# Altium PCB Backlight_V2.PcbDoc
Units mm, origin at the board's own origin, x right, y up, seen from the top; angles counter-clockwise.
Board outline 300.25 x 200.25 mm, 2 copper layers (Top Layer, Bottom Layer); 98 components, 59 nets, 200 pads, 33 vias.
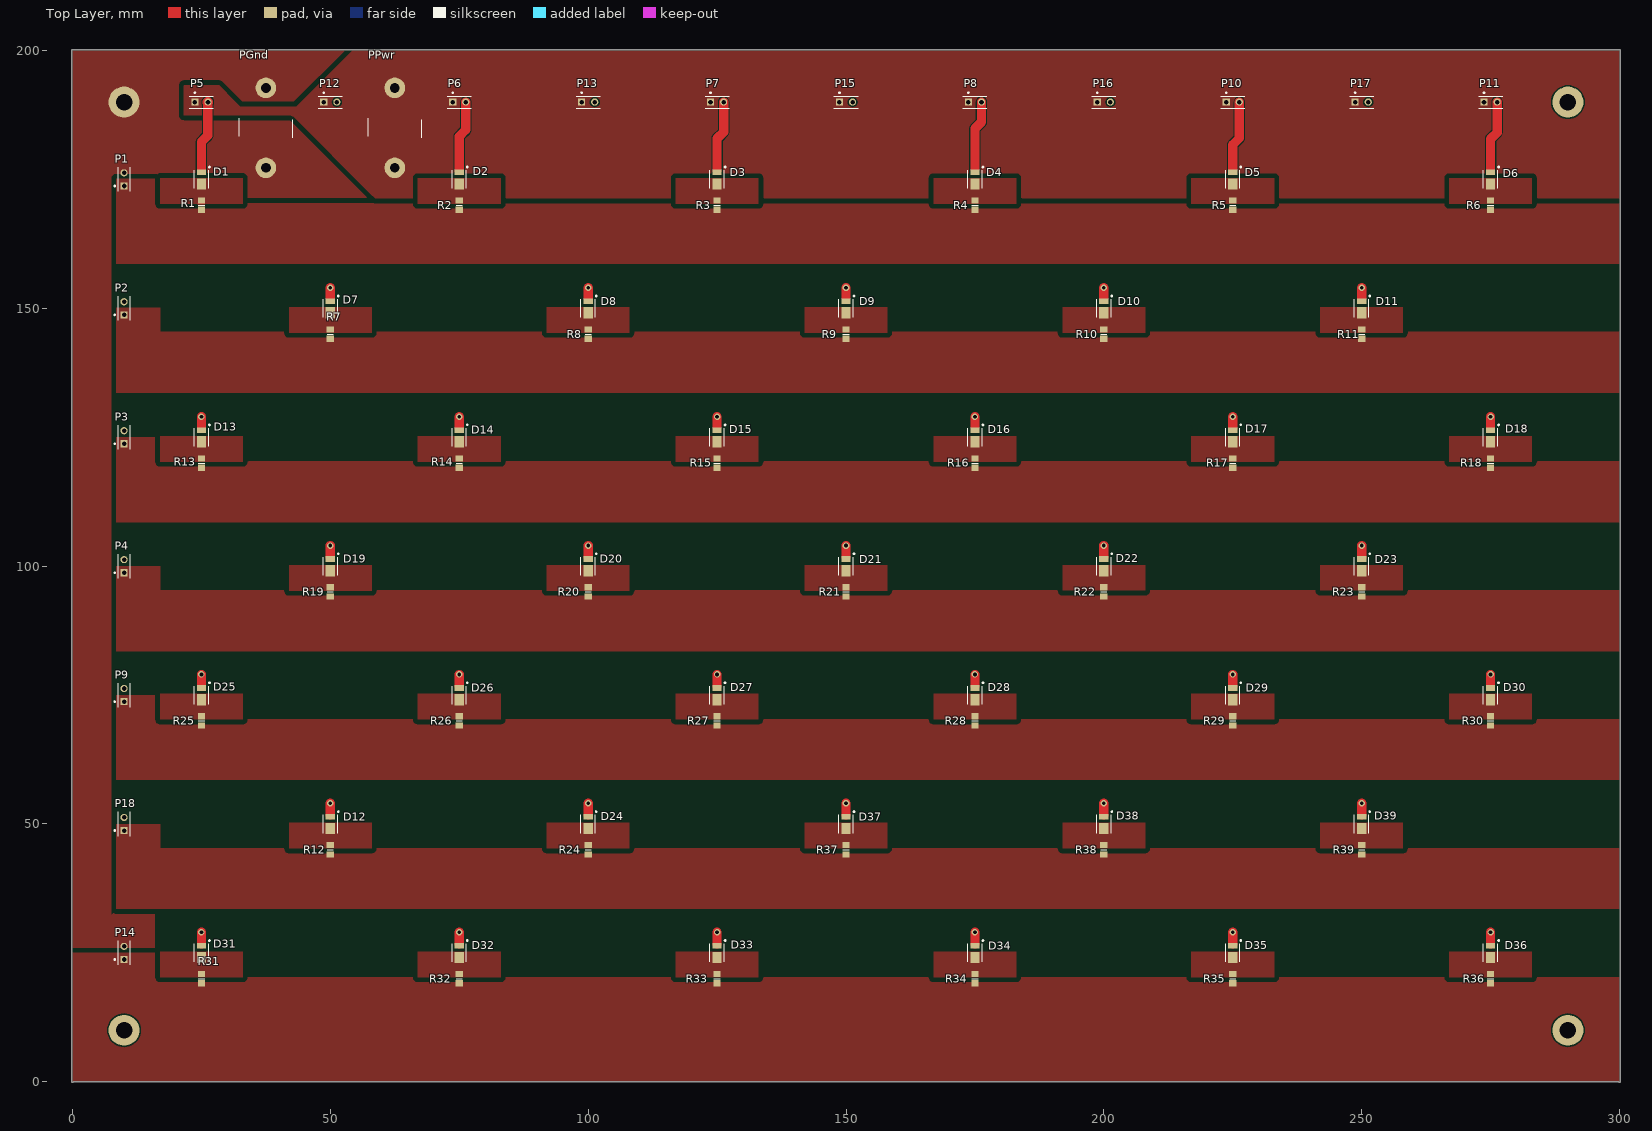
[diagram p0: Top Layer view]
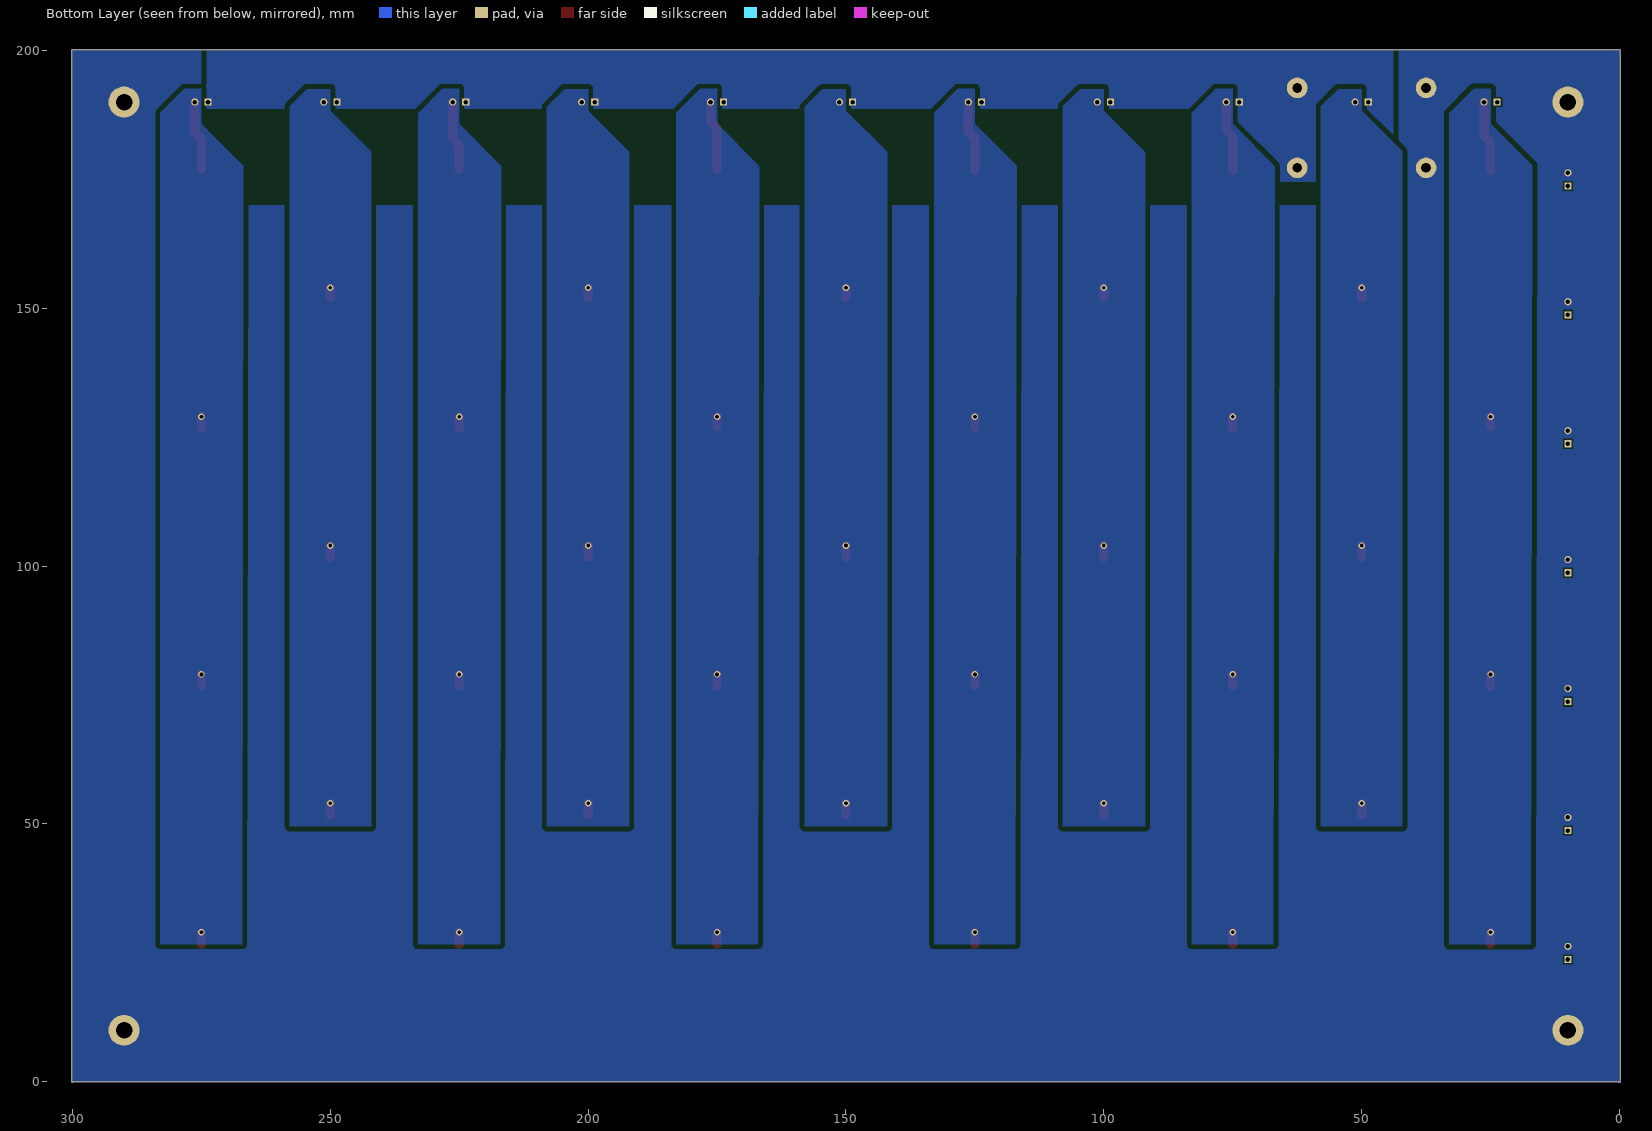
[diagram p1: Bottom Layer view, seen from below]
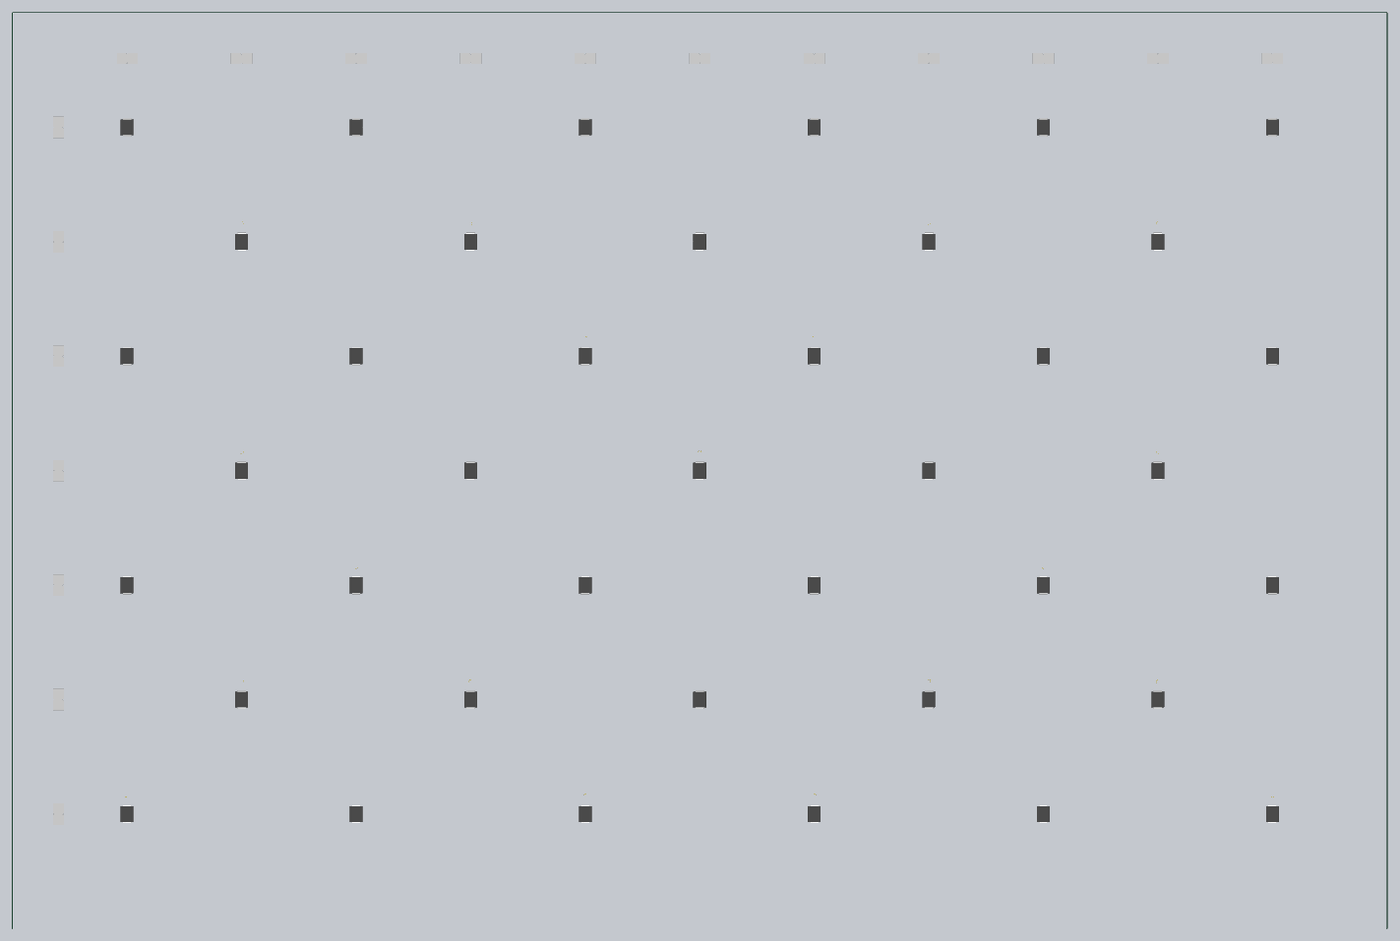
[diagram p2: 3D render of the assembled board from above, using the file's embedded part models]

## Layer stack, top to bottom
Top Solder: solder mask 0.0102, Solder Resist, Dk 3.5
Top Layer: signal copper 0.0356
Dielectric 1: dielectric 0.32, FR-4, Dk 4.8
Bottom Layer: signal copper 0.0356
Bottom Solder: solder mask 0.0102, Solder Resist, Dk 3.5

## Board outline
-0.127,0 -0.127,200 cw(c0,200) 0,200.127 300,200.127 cw(c300,200) 300.127,200 300.127,0 cw(c300,0) 299.873,0 0.127,0 cw(c0,0)

## Design rules (kind name [scope] priority, off if disabled: settings)
Clearance [All] p1: gap=0.254 ignorepadtopadclearanceinfootprint=FALSE except(0: Arc-Hole Track-Hole SMDPad-Hole THPad-Hole Via-Hole Fill-Hole Poly-Hole Region-Hole Text-Hole; 1: Fill-Fill Fill-Poly Fill-Region Poly-Poly Poly-Region Region-Region)
PolygonConnect [All] p1: connectstyle=Direct reliefconductorwidth=0.254 reliefentries=4 polygonreliefangle="90 Angle" airgapwidth=0.254
RoomDefinition Backlight_V2 [InComponentClass('Backlight_V2')] p1: confinementstyle=ConfineIn formatcopy=TRUE lockcomponents=FALSE outline 0,0 300.101,0 300.101,200.025 0,200.025
RoutingVias [All] p1: holewidth=0.711 width=1.27 viastyle="Through Hole" minholewidth=0.711 minwidth=1.27 maxholewidth=0.711 maxwidth=1.27
SolderMaskExpansion [All] p1: expansion=0.102 istentingtop=FALSE
Width [All] p1: maxlimit=10 minlimit=0.1 preferedwidth=1.8
30 further rules are at their usual default settings.

## Components (designator, comment, footprint, x,y, rotation, side; value= is the part's Value field where it differs from the comment)
D1 "LED0" DIOM3528X07N 25,175 r270 top
D2 "LED0" DIOM3528X07N 75,175 r270 top
D3 "LED0" DIOM3528X07N 125,175 r270 top
D4 "LED0" DIOM3528X07N 175,175 r270 top
D5 "LED0" DIOM3528X07N 225,175 r270 top
D6 "LED0" DIOM3528X07N 275,175 r270 top
D7 "LED0" DIOM3528X07N 50,150 r270 top
D8 "LED0" DIOM3528X07N 100,150 r270 top
D9 "LED0" DIOM3528X07N 150,150 r270 top
D10 "LED0" DIOM3528X07N 200,150 r270 top
D11 "LED0" DIOM3528X07N 250,150 r270 top
D12 "LED0" DIOM3528X07N 50,50 r270 top
D13 "LED0" DIOM3528X07N 25,125 r270 top
D14 "LED0" DIOM3528X07N 75,125 r270 top
D15 "LED0" DIOM3528X07N 125,125 r270 top
D16 "LED0" DIOM3528X07N 175,125 r270 top
D17 "LED0" DIOM3528X07N 225,125 r270 top
D18 "LED0" DIOM3528X07N 275,125 r270 top
D19 "LED0" DIOM3528X07N 50,100 r270 top
D20 "LED0" DIOM3528X07N 100,100 r270 top
D21 "LED0" DIOM3528X07N 150,100 r270 top
D22 "LED0" DIOM3528X07N 200,100 r270 top
D23 "LED0" DIOM3528X07N 250,100 r270 top
D24 "LED0" DIOM3528X07N 100,50 r270 top
D25 "LED0" DIOM3528X07N 25,75 r270 top
D26 "LED0" DIOM3528X07N 75,75 r270 top
D27 "LED0" DIOM3528X07N 125,75 r270 top
D28 "LED0" DIOM3528X07N 175,75 r270 top
D29 "LED0" DIOM3528X07N 225,75 r270 top
D30 "LED0" DIOM3528X07N 275,75 r270 top
D31 "LED0" DIOM3528X07N 25,25 r270 top
D32 "LED0" DIOM3528X07N 75,25 r270 top
D33 "LED0" DIOM3528X07N 125,25 r270 top
D34 "LED0" DIOM3528X07N 175,25 r270 top
D35 "LED0" DIOM3528X07N 225,25 r270 top
D36 "LED0" DIOM3528X07N 275,25 r270 top
D37 "LED0" DIOM3528X07N 150,50 r270 top
D38 "LED0" DIOM3528X07N 200,50 r270 top
D39 "LED0" DIOM3528X07N 250,50 r270 top
P1 "5-146280-2" TECO-5-146280-2_V 10,175 r90 top
P2 "5-146280-2" TECO-5-146280-2_V 10,150 r90 top
P3 "5-146280-2" TECO-5-146280-2_V 10,125 r90 top
P4 "5-146280-2" TECO-5-146280-2_V 10,100 r90 top
P5 "5-146280-2" TECO-5-146280-2_V 25,190 r0 top
P6 "5-146280-2" TECO-5-146280-2_V 75,190 r0 top
P7 "5-146280-2" TECO-5-146280-2_V 125,190 r0 top
P8 "5-146280-2" TECO-5-146280-2_V 175,190 r0 top
P9 "5-146280-2" TECO-5-146280-2_V 10,75 r90 top
P10 "5-146280-2" TECO-5-146280-2_V 225,190 r0 top
P11 "5-146280-2" TECO-5-146280-2_V 275,190 r0 top
P12 "5-146280-2" TECO-5-146280-2_V 50,190 r0 top
P13 "5-146280-2" TECO-5-146280-2_V 100,190 r0 top
P14 "5-146280-2" TECO-5-146280-2_V 10,25 r90 top
P15 "5-146280-2" TECO-5-146280-2_V 150,190 r0 top
P16 "5-146280-2" TECO-5-146280-2_V 200,190 r0 top
P17 "5-146280-2" TECO-5-146280-2_V 250,190 r0 top
P18 "5-146280-2" TECO-5-146280-2_V 10,50 r90 top
PGnd "Plug" Bananenbuchse 37.5,185 r90 top
PPwr "Plug" Bananenbuchse 62.5,185 r90 top
R1 "Res2" 6-0805_N 25,170 r90 top value=100
R2 "Res2" 6-0805_N 75,170 r90 top value=100
R3 "Res2" 6-0805_N 125,170 r90 top value=100
R4 "Res2" 6-0805_N 175,170 r90 top value=100
R5 "Res2" 6-0805_N 225,170 r90 top value=100
R6 "Res2" 6-0805_N 275,170 r90 top value=100
R7 "Res2" 6-0805_N 50,145 r90 top value=100
R8 "Res2" 6-0805_N 100,145 r90 top value=100
R9 "Res2" 6-0805_N 150,145 r90 top value=100
R10 "Res2" 6-0805_N 200,145 r90 top value=100
R11 "Res2" 6-0805_N 250,145 r90 top value=100
R12 "Res2" 6-0805_N 50,45 r90 top value=100
R13 "Res2" 6-0805_N 25,120 r90 top value=100
R14 "Res2" 6-0805_N 75,120 r90 top value=100
R15 "Res2" 6-0805_N 125,120 r90 top value=100
R16 "Res2" 6-0805_N 175,120 r90 top value=100
R17 "Res2" 6-0805_N 225,120 r90 top value=100
R18 "Res2" 6-0805_N 275,120 r90 top value=100
R19 "Res2" 6-0805_N 50,95 r90 top value=100
R20 "Res2" 6-0805_N 100,95 r90 top value=100
R21 "Res2" 6-0805_N 150,95 r90 top value=100
R22 "Res2" 6-0805_N 200,95 r90 top value=100
R23 "Res2" 6-0805_N 250,95 r90 top value=100
R24 "Res2" 6-0805_N 100,45 r90 top value=100
R25 "Res2" 6-0805_N 25,70 r90 top value=100
R26 "Res2" 6-0805_N 75,70 r90 top value=100
R27 "Res2" 6-0805_N 125,70 r90 top value=100
R28 "Res2" 6-0805_N 175,70 r90 top value=100
R29 "Res2" 6-0805_N 225,70 r90 top value=100
R30 "Res2" 6-0805_N 275,70 r90 top value=100
R31 "Res2" 6-0805_N 25,20 r90 top value=100
R32 "Res2" 6-0805_N 75,20 r90 top value=100
R33 "Res2" 6-0805_N 125,20 r90 top value=100
R34 "Res2" 6-0805_N 175,20 r90 top value=100
R35 "Res2" 6-0805_N 225,20 r90 top value=100
R36 "Res2" 6-0805_N 275,20 r90 top value=100
R37 "Res2" 6-0805_N 150,45 r90 top value=100
R38 "Res2" 6-0805_N 200,45 r90 top value=100
R39 "Res2" 6-0805_N 250,45 r90 top value=100

## Footprints (in the part's own frame and the unit in brackets; to place one, negate y for a bottom-side part, rotate by r counter-clockwise, add the part's x,y. Pads: shape width x height; smd on the part's side, far side on the other; paste and mask are expansions set on the pad)
6-0805_N [mm] "Chip Resistor, Body 2.0x1.2mm, IPC Medium Density"
  rect 1.2x1.4 smd: 1(-0.9,0) 2(0.9,0)
  silkscreen extent 0,-0.6 0,0.6, body extent -1.07,-0.7 1.07,0.7, height 0.7
Bananenbuchse [mm]
  round 4 hole 1.9: 1(-7.75,0) 1(7.75,0)
  silkscreen extent -1.95,-5.23 1.83,5.18, body extent -11.4,-5.42 12.62,5.42, height 12.6
DIOM3528X07N [mm] "Molded Diode, 2-Leads, Body 3.50x2.80mm, IPC Medium Density"
  rect 1.1x1.8 smd: 1(-1.375,0)
  rect 2.2x1.8 smd: 2(0.875,0)
  silkscreen extent -2.52,-1.4 1.75,1.68, body extent -1.97,-1.4 1.97,1.4, height 0.7
TECO-5-146280-2_V [mm] "Connector, 2-Leads, Body 4.67x2.34mm, Pitch 2.54mm"
  rect 1.4x1.4 hole 0.89: 1(-1.27,0)
  round 1.4 hole 0.89: 2(1.27,0)
  silkscreen extent -2.33,-1.17 2.33,1.94, body extent -2.34,-1.17 2.34,1.17, height 5.33

## Part data
D1 D2 D3 D4 D5 D6 D7 D8 D9 D10 D11 D12 D13 D14 D15 D16 D17 D18 D19 D20 D21 D22 D23 D24 D25 D26 D27 D28 D29 D30 D31 D32 D33 D34 D35 D36 D37 D38 D39: "Typical INFRARED GaAs LED", LatestRevisionDate=08-Jul-2005, LatestRevisionNote="Mech Layer 1 removed.", PackageDescription="LED; 2 Leads", PackageReference=LED-0, Published=8-Jun-2000, Publisher="Altium Limited"
P1 P2 P3 P4 P5 P6 P7 P8 P9 P10 P11 P12 P13 P14 P15 P16 P17 P18: library part CMP-2000-07492-1, "Male Header, Pitch 2.54 mm, 1 x 2 Position, Height 8.21 mm, Tail Length 3.05 mm, -65 to 105 degC, RoHS, Bulk", Case\/Package=100, Colour=Black, Current Rating=3A, Flammability Rating=UL94V-0, High Temperature Housing=Yes, Manufacturer="TE Connectivity", Max Current Rating=5A, Max Operating Temperature=105degC, Min Operating Temperature=-65degC, Package Description="Male Header, Pitch 2.54 mm, 1 x 2 Position, Height 8.21 mm, Tail Length 3.05 mm", Package Quantity=500, Approvals=CSA, Board Standoff=No(Without), Connector Type=Header, Contact Gender=Male, Contact Material=CopperAlloy, Contact Mating Length=0.23inch, Contact Plating=Matte, Contact Protection=No(Without), Contact Shape=Square, Datasheet URL=http://www.te.com/commerce/DocumentDelivery/DDEController?Action=showdoc&DocId=Customer+Drawing%7F146280%7FH1%7Fpdf%7FEnglish%7FENG_CD_146280_H1.pdf%7F5-146280-2, Datasheet Version="Rev. H1, 08/2016", Depth=2.34mm, Gasket=No(Without), High Speed Serial Data Connector=No, Housing Colour=Black, Housing Material=Polymer, Keyed=No, Length=4.67mm, Manufacturer URL=http://www.te.com/, Mating Alignment=No(Without), Mating Connector Lock=No(Without), Mating Post Length=0.23inch, Mount=ThroughHole, Mounting Technology=ThroughHole, Number of Contacts=2, Number of Positions=2, Number of Rows=1, Orientation=Straight, Package Reference=5-146280-2, Packaging=Carton, Panel Mount Retention=No(Without), PCB Mount Retention=Without, PCB Mounting Orientation=Vertical, PCB Thickness=0.063inch, Pitch=2.54mm, Radiation Hardening=No, RoHSCompliant=true, Row Spacing=2.54mm, Selectively Loaded=No(Without), Stabilizers=No(Without), Termination=ThroughHole, Termination Post Length=0.12inch
R1 R2 R3 R4 R5 R6 R7 R8 R9 R10 R11 R12 R13 R14 R15 R16 R17 R18 R19 R20 R21 R22 R23 R24 R25 R26 R27 R28 R29 R30 R31 R32 R33 R34 R35 R36 R37 R38 R39: "Resistor", LatestRevisionDate=17-Jul-2002, LatestRevisionNote="Re-released for DXP Platform.", PackageDescription="Axial Device, Thru-Hole; 2 Leads; 0.4 in Pin Spacing", PackageReference=AXIAL-0.4, Published=8-Jun-2000, Publisher="Altium Limited"
PGnd PPwr: LatestRevisionDate=17-Jul-2002, LatestRevisionNote="Re-released for DXP Platform.", Publisher="Altium Limited"

## Free pads (board coordinates)
  round 6 hole 3.2: 1(10,10) 1(10,190) 1(290,10) 1(290,190)

## Via types
v1: diameter 1.27, hole 0.711, Top Layer to Bottom Layer, 33 vias

## Nets (pads, with @x,y where several pads share a name; then routed paths per layer and width w, separated by ;. In a path a pad name is that pad's centre, name@x,y a point inside that pad or via, vN(x,y) a via of type N, cw(c..) or ccw(c..) an arc to the next point about the centre after c; other vN are vias at no path point)
GND: P1.2 P2.2 P3.2 P4.2 P9.2 P14.2 P18.2 pad.1 PGnd.1
Hex1: D7.1 D12.1 D19.1 P12.2 | length 6.5
  Top Layer w1.8: D12.1@50,51.75 v1(50,54) ; D19.1@50,101.75 v1(50,104) ; 50,152.027 v1(50,154)
Hex2: D8.1 D20.1 D24.1 P13.2 | length 6.5
  Top Layer w1.8: D24.1@100,51.75 v1(100,54) ; D20.1@100,101.75 v1(100,104) ; 100,152.016 v1(100,154)
Hex3: D9.1 D21.1 D37.1 P15.2 | length 6.5
  Top Layer w1.8: D37.1@150,51.75 v1(150,54) ; D21.1@150,101.75 v1(150,104) ; 150,152.035 v1(150,154)
Hex4: D10.1 D22.1 D38.1 P16.2 | length 6.5
  Top Layer w1.8: D38.1@200,51.75 v1(200,54) ; D22.1@200,101.75 v1(200,104) ; 200,151.996 v1(200,154)
Hex5: D11.1 D23.1 D39.1 P17.2 | length 6.5
  Top Layer w1.8: D39.1@250,51.75 v1(250,54) ; D23.1@250,101.75 v1(250,104) ; 250,152.016 v1(250,154)
NetD1_2: D1.2 R1.2 | length 0
NetD2_2: D2.2 R2.2
NetD3_2: D3.2 R3.2
NetD4_2: D4.2 R4.2
NetD5_2: D5.2 R5.2
NetD6_2: D6.2 R6.2
NetD7_2: D7.2 R7.2
NetD8_2: D8.2 R8.2
NetD9_2: D9.2 R9.2
NetD10_2: D10.2 R10.2
NetD11_2: D11.2 R11.2
NetD12_2: D12.2 R12.2
NetD13_2: D13.2 R13.2
NetD14_2: D14.2 R14.2
NetD15_2: D15.2 R15.2
NetD16_2: D16.2 R16.2
NetD17_2: D17.2 R17.2
NetD18_2: D18.2 R18.2
NetD19_2: D19.2 R19.2
NetD20_2: D20.2 R20.2
NetD21_2: D21.2 R21.2
NetD22_2: D22.2 R22.2
NetD23_2: D23.2 R23.2
NetD24_2: D24.2 R24.2
NetD25_2: D25.2 R25.2
NetD26_2: D26.2 R26.2
NetD27_2: D27.2 R27.2
NetD28_2: D28.2 R28.2
NetD29_2: D29.2 R29.2
NetD30_2: D30.2 R30.2
NetD31_2: D31.2 R31.2
NetD32_2: D32.2 R32.2
NetD33_2: D33.2 R33.2
NetD34_2: D34.2 R34.2
NetD35_2: D35.2 R35.2
NetD36_2: D36.2 R36.2
NetD37_2: D37.2 R37.2
NetD38_2: D38.2 R38.2
NetD39_2: D39.2 R39.2
NetP1_1: P1.1 R1.1 R2.1 R3.1 R4.1 R5.1 R6.1
NetP2_1: P2.1 R7.1 R8.1 R9.1 R10.1 R11.1
NetP3_1: P3.1 R13.1 R14.1 R15.1 R16.1 R17.1 R18.1
NetP4_1: P4.1 R19.1 R20.1 R21.1 R22.1 R23.1
NetP9_1: P9.1 R25.1 R26.1 R27.1 R28.1 R29.1 R30.1
NetP14_1: P14.1 R31.1 R32.1 R33.1 R34.1 R35.1 R36.1
NetP18_1: P18.1 R12.1 R24.1 R37.1 R38.1 R39.1
Sqr1: D1.1 D13.1 D25.1 D31.1 P5.2 | length 20.2
  Top Layer w1.8: D31.1@25,26.75 v1(25,29) ; D25.1@25,76.75 v1(25,79) ; 25,127.083 v1(25,129) ; D1.1@25,176.75 25,182.296 26.236,183.532 P5.2@26.236,189.966
  Top Layer w2: P5.2@26.236,189.966 P5.2
Sqr2: D2.1 D14.1 D26.1 D32.1 P6.2 | length 20.5
  Top Layer w1.8: D32.1@75,26.75 v1(75,29) ; D26.1@75,76.75 v1(75,79) ; D14.1@75,126.75 v1(75,129) ; D2.1@75,176.75 75,183.335 76.27,184.605 P6.2
Sqr3: D3.1 D15.1 D27.1 D33.1 P7.2 | length 20.3
  Top Layer w1.8: D33.1@125,26.75 v1(125,29) ; D27.1@125,76.75 v1(125,79) ; 125,126.965 v1(125,129) ; D3.1@125,176.75 125,182.926 126.27,184.196 P7.2
Sqr4: D4.1 D16.1 D28.1 D34.1 P8.2 | length 20
  Top Layer w1.8: D34.1@175,26.75 v1(175,29) ; D28.1@175,76.75 v1(175,79) ; 175,127.003 v1(175,129) ; 175,176.991 175,184.867 176.27,186.137 P8.2
Sqr5: D5.1 D17.1 D29.1 D35.1 P10.2 | length 20.3
  Top Layer w1.8: D35.1@225,26.75 v1(225,29) ; D29.1@225,76.75 v1(225,79) ; D17.1@225,126.75 v1(225,129) ; 225,176.991 225,181.741 226.27,183.011 P10.2
Sqr6: D6.1 D18.1 D30.1 D36.1 P11.2 | length 20.2
  Top Layer w1.8: D36.1@275,26.75 v1(275,29) ; D30.1@275,76.75 v1(275,79) ; D18.1@275,126.75 v1(275,129) ; 275,177.083 275,182.844 276.27,184.114 P11.2
VCC: P5.1 P6.1 P7.1 P8.1 P10.1 P11.1 P12.1 P13.1 P15.1 P16.1 P17.1 PPwr.1

## Polygon pours and split planes (outlines as drawn)
GND on Top Layer "GND_L01_P052" (solid, pour order 52): 0,200 0,25 15.991,25 15.962,25.029 15.962,33.429 8.593,33.429 7.48,32.317 7.48,175 32.76,175 33,175.24 33.023,175.217 33.023,170 75,170 75,200
VCC on Top Layer "VCC_L01_P050" (solid, pour order 50): 21.596,193.3 21.596,186.641 43.364,186.641 60.005,170 300,170 300,200 54.222,200 43.35,189.122 32.536,189.122 28.363,193.295
no net on Top Layer "NONET_L01_P047" (solid, pour order 47): 15.991,25
NetP1_1 on Top Layer "NETP1_1_L01_P046" (solid, pour order 46): 8.5,175.123 17.03,175.123 17,175.093 17,170.426 299.968,170.426 300,170.395 300,158.664 8.5,158.664
NetP2_1 on Top Layer "NETP2_1_L01_P045" (solid, pour order 45): 8.5,150.123 17.03,150.123 17,150.093 17,145.426 299.968,145.426 300,145.395 300,133.664 8.5,133.664
NetP3_1 on Top Layer "NETP3_1_L01_P044" (solid, pour order 44): 8.5,125 17.03,125 17,124.97 17,120.304 299.968,120.304 300,120.272 300,108.542 8.5,108.542
NetP4_1 on Top Layer "NETP4_1_L01_P043" (solid, pour order 43): 8.5,100 17.03,100 17,99.97 17,95.304 299.968,95.304 300,95.272 300,83.542 8.5,83.542
NetP9_1 on Top Layer "NETP9_1_L01_P042" (solid, pour order 42): 8.5,75 17.03,75 17,74.97 17,70.304 299.968,70.304 300,70.272 300,58.542 8.5,58.542
NetP18_1 on Top Layer "NETP18_1_L01_P041" (solid, pour order 41): 8.5,50 17.03,50 17,49.97 17,45.304 299.968,45.304 300,45.272 300,33.542 8.5,33.542
NetP14_1 on Top Layer "NETP14_1_L01_P040" (solid, pour order 40): 0,25 17.03,25 17,24.97 17,20.304 299.968,20.304 300,20.272 300,0 0,0
NetD31_2 on Top Layer "NETD31_2_L01_P039" (solid, pour order 39): 17,20.304 33,20.304 33,25.239 17,25.239
NetD32_2 on Top Layer "NETD32_2_L01_P038" (solid, pour order 38): 67,20.285 83,20.285 83,25.22 67,25.22
NetD33_2 on Top Layer "NETD33_2_L01_P037" (solid, pour order 37): 117,20.285 133,20.285 133,25.22 117,25.22
NetD34_2 on Top Layer "NETD34_2_L01_P036" (solid, pour order 36): 167,20.304 183,20.304 183,25.239 167,25.239
NetD35_2 on Top Layer "NETD35_2_L01_P035" (solid, pour order 35): 217,20.285 233,20.285 233,25.22 217,25.22
NetD36_2 on Top Layer "NETD36_2_L01_P034" (solid, pour order 34): 267,20.285 283,20.285 283,25.22 267,25.22
NetD39_2 on Top Layer "NETD39_2_L01_P033" (solid, pour order 33): 242,45.281 258,45.281 258,50.216 242,50.216
NetD38_2 on Top Layer "NETD38_2_L01_P032" (solid, pour order 32): 192,45.284 208,45.283 208,50.219 192,50.219
NetD37_2 on Top Layer "NETD37_2_L01_P031" (solid, pour order 31): 142,45.284 158,45.283 158,50.219 142,50.219
NetD24_2 on Top Layer "NETD24_2_L01_P030" (solid, pour order 30): 92,45.275 108,45.275 108,50.211 92,50.211
NetD12_2 on Top Layer "NETD12_2_L01_P029" (solid, pour order 29): 42,45.275 58,45.275 58,50.211 42,50.211
NetD25_2 on Top Layer "NETD25_2_L01_P028" (solid, pour order 28): 17,70.281 33,70.281 33,75.216 17,75.216
NetD26_2 on Top Layer "NETD26_2_L01_P027" (solid, pour order 27): 67,70.281 83,70.281 83,75.216 67,75.216
NetD27_2 on Top Layer "NETD27_2_L01_P026" (solid, pour order 26): 117,70.281 133,70.281 133,75.216 117,75.216
NetD28_2 on Top Layer "NETD28_2_L01_P025" (solid, pour order 25): 167,70.281 183,70.281 183,75.216 167,75.216
NetD29_2 on Top Layer "NETD29_2_L01_P024" (solid, pour order 24): 217,70.281 233,70.281 233,75.216 217,75.216
NetD30_2 on Top Layer "NETD30_2_L01_P023" (solid, pour order 23): 267,70.281 283,70.281 283,75.216 267,75.216
NetD23_2 on Top Layer "NETD23_2_L01_P022" (solid, pour order 22): 242,95.284 258,95.284 258,100.22 242,100.22
NetD22_2 on Top Layer "NETD22_2_L01_P021" (solid, pour order 21): 192,95.284 208,95.284 208,100.22 192,100.22
NetD21_2 on Top Layer "NETD21_2_L01_P020" (solid, pour order 20): 142,95.272 158,95.272 158,100.208 142,100.208
NetD20_2 on Top Layer "NETD20_2_L01_P019" (solid, pour order 19): 92,95.272 108,95.272 108,100.208 92,100.208
NetD19_2 on Top Layer "NETD19_2_L01_P018" (solid, pour order 18): 42,95.275 58,95.275 58,100.211 42,100.211
NetD13_2 on Top Layer "NETD13_2_L01_P017" (solid, pour order 17): 17,120.284 33,120.283 33,125.219 17,125.219
NetD14_2 on Top Layer "NETD14_2_L01_P016" (solid, pour order 16): 67,120.284 83,120.283 83,125.219 67,125.219
NetD15_2 on Top Layer "NETD15_2_L01_P015" (solid, pour order 15): 117,120.284 133,120.283 133,125.219 117,125.219
NetD16_2 on Top Layer "NETD16_2_L01_P014" (solid, pour order 14): 167,120.275 183,120.275 183,125.21 167,125.21
NetD17_2 on Top Layer "NETD17_2_L01_P013" (solid, pour order 13): 217,120.284 233,120.283 233,125.219 217,125.219
NetD18_2 on Top Layer "NETD18_2_L01_P012" (solid, pour order 12): 267,120.275 283,120.275 283,125.21 267,125.21
NetD11_2 on Top Layer "NETD11_2_L01_P011" (solid, pour order 11): 242,145.288 258,145.288 258,150.223 242,150.223
NetD10_2 on Top Layer "NETD10_2_L01_P010" (solid, pour order 10): 192,145.281 208,145.281 208,150.216 192,150.216
NetD9_2 on Top Layer "NETD9_2_L01_P009" (solid, pour order 9): 142,145.283 158,145.283 158,150.218 142,150.218
NetD8_2 on Top Layer "NETD8_2_L01_P008" (solid, pour order 8): 92,145.278 108,145.278 108,150.213 92,150.213
NetD7_2 on Top Layer "NETD7_2_L01_P007" (solid, pour order 7): 42,145.274 58,145.274 58,150.21 42,150.21
NetD6_2 on Top Layer "NETD6_2_L01_P006" (solid, pour order 6): 267,170.276 283,170.276 283,175.212 267,175.212
NetD5_2 on Top Layer "NETD5_2_L01_P005" (solid, pour order 5): 217,170.285 233,170.285 233,175.22 217,175.22
NetD4_2 on Top Layer "NETD4_2_L01_P004" (solid, pour order 4): 167,170.285 183,170.285 183,175.22 167,175.22
NetD3_2 on Top Layer "NETD3_2_L01_P003" (solid, pour order 3): 117,170.281 133,170.281 133,175.216 117,175.216
NetD2_2 on Top Layer "NETD2_2_L01_P002" (solid, pour order 2): 67,170.29 83,170.29 83,175.226 67,175.226
NetD1_2 on Top Layer "NETD1_2_L01_P001" (solid, pour order 1): 17,170.304 33,170.304 33,175.24 17,175.24
no net on Top Layer "NONET_L01_P000" (solid, pour order 0): 24.315,170.304 24.322,170.298 25.687,170.298
VCC on Bottom Layer "VCC_L02_P065" (solid, pour order 65): 42.846,200 275,200 275,188.747 75.299,188.747 75.299,174.575 42.846,174.575
GND on Bottom Layer "GND_L02_P064" (solid, remove dead copper, pour order 64): 275,170 42.846,170 42.846,200 0,200 0,0 300,0 300,200 275,200
Sqr6 on Bottom Layer "SQR6_L02_P063" (solid, pour order 63): 275,192.562 278.285,192.562 282.95,187.898 282.95,26.685 267.107,26.685 266.849,177.607 275,185.759
Sqr5 on Bottom Layer "SQR5_L02_P062" (solid, pour order 62): 225,192.562 228.285,192.562 232.998,187.849 232.998,26.685 217.094,26.685 216.836,177.595 225,185.759
Sqr4 on Bottom Layer "SQR4_L02_P061" (solid, pour order 61): 175,192.562 178.285,192.562 182.924,187.924 182.924,26.685 167.081,26.685 166.823,177.581 175,185.759
Sqr3 on Bottom Layer "SQR3_L02_P060" (solid, pour order 60): 125,192.562 128.285,192.562 132.911,187.937 132.911,26.685 117.136,26.685 116.878,177.636 125,185.759
Sqr2 on Bottom Layer "SQR2_L02_P059" (solid, pour order 59): 75,192.562 78.285,192.562 82.959,187.888 82.959,26.685 67.098,26.685 66.84,177.599 75,185.759
Hex5 on Bottom Layer "HEX5_L02_P058" (solid, pour order 58): 250,192.516 254.584,192.516 257.913,189.187 257.913,49.551 242.08,49.551 242.08,180.414 250,188.334
Hex4 on Bottom Layer "HEX4_L02_P057" (solid, pour order 57): 200,192.516 204.584,192.516 208.022,189.078 208.022,49.551 192.067,49.551 192.067,180.401 200,188.334
Hex3 on Bottom Layer "HEX3_L02_P056" (solid, pour order 56): 150,192.516 154.584,192.516 158.009,189.091 158.009,49.551 141.993,49.551 141.993,180.326 150,188.334
Hex2 on Bottom Layer "HEX2_L02_P055" (solid, pour order 55): 100,192.516 104.584,192.516 107.935,189.165 107.935,49.551 91.98,49.551 91.98,180.313 100,188.334
Hex1 on Bottom Layer "HEX1_L02_P054" (solid, pour order 54): 50,192.516 54.584,192.516 57.922,189.178 57.922,49.551 42.09,49.551 42.09,180.423 50,188.334
Sqr1 on Bottom Layer "SQR1_L02_P053" (solid, pour order 53): 25,192.562 28.285,192.562 33.007,187.84 33.007,26.685 17.204,26.685 16.946,177.705 25,185.759

## Silkscreen, mask and mechanical layers (free items; w line width, h text height)
Board:
  lines w0.254: 0,0 300,0 300,200 0,200 0,0